# EAGLE board Fram_pcb (EAGLE 9.7.0)
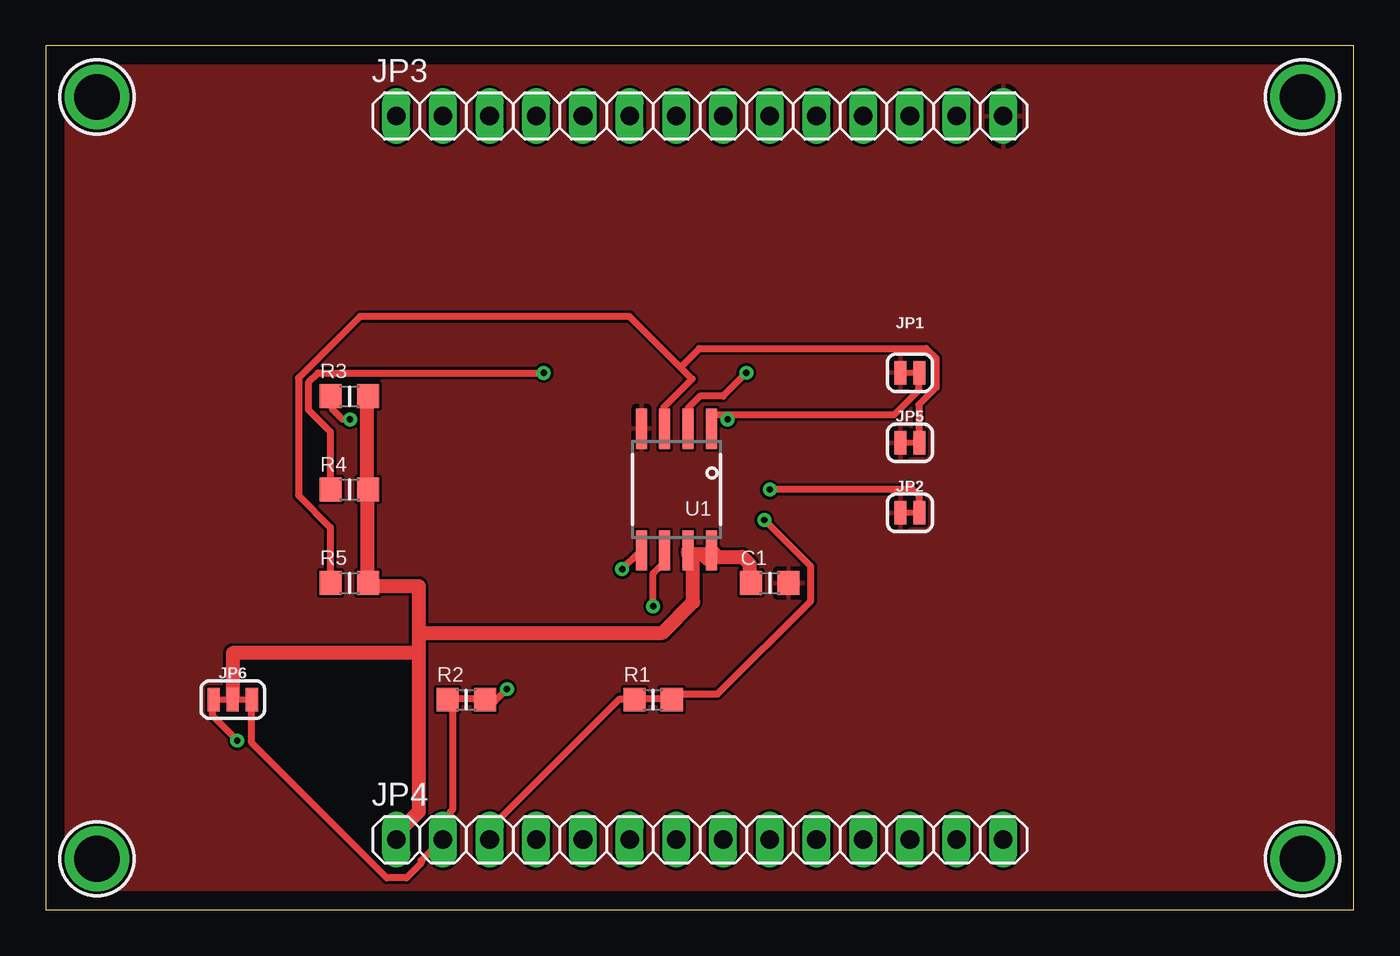
[diagram p0: board, top side]
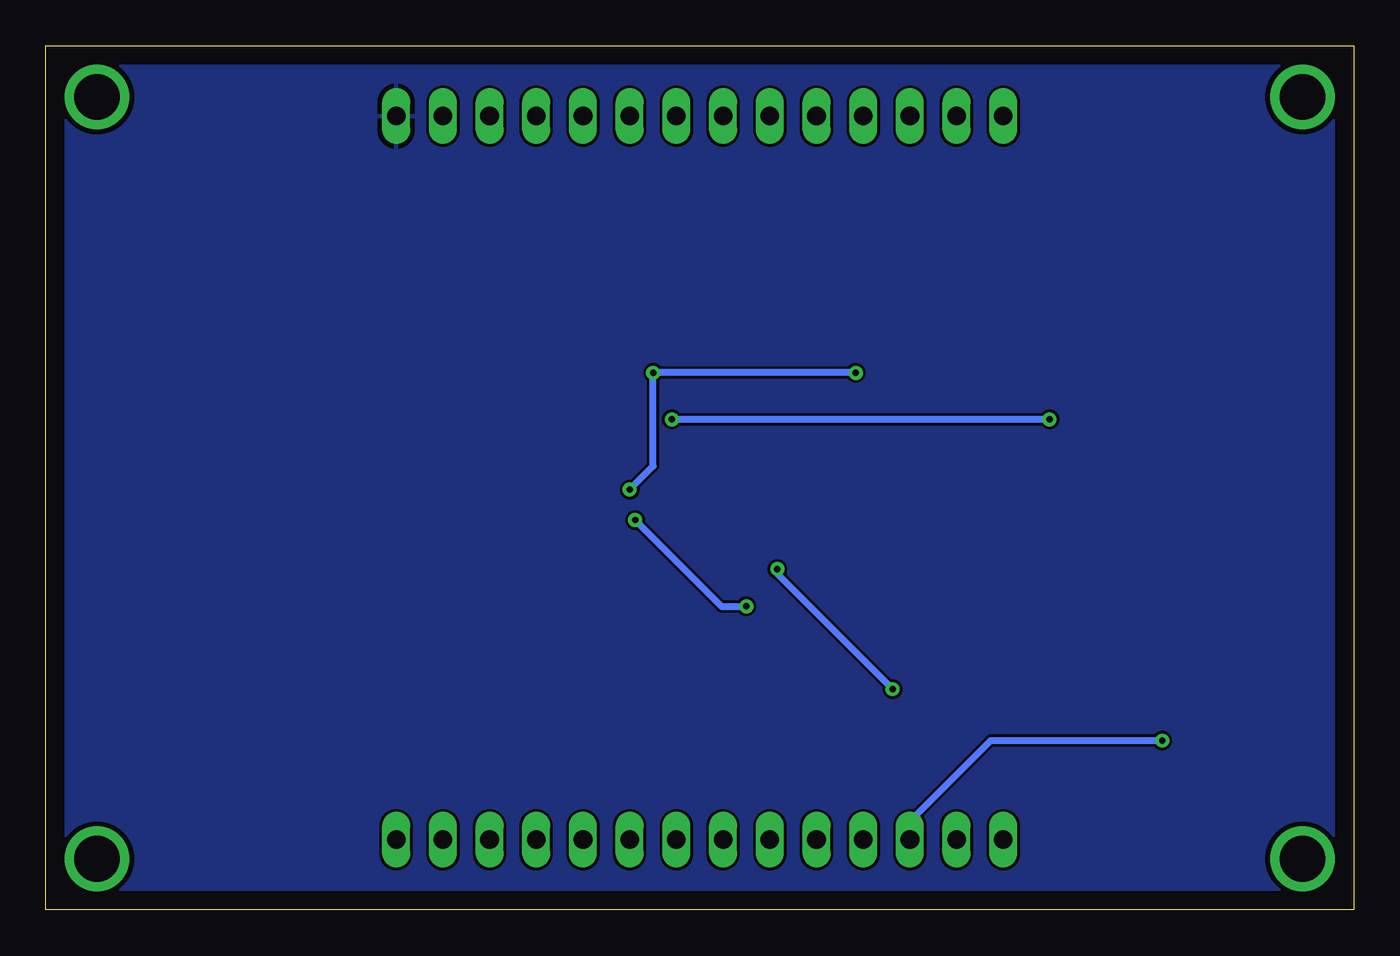
[diagram p1: board, bottom side, seen from below]

Size 71.12 x 46.99 mm. Coordinates in mm from the lower left corner, seen from the top.
Outline: 0,0 71.12,0 71.12,46.99 0,46.99 0,0
Copper layers (1*16): Top 0.035mm / dielectric 1.5mm / Bottom 0.035mm
Design rules "default": minimum track width 6mil, minimum drill 0.35mm, track to track 6mil, track to pad 6mil, pad to pad 6mil, via to via 6mil, smd to smd 6mil, copper to edge 40mil, drill to drill 6mil, minimum pad ring 10mil, minimum via ring 8mil, stop-mask expansion 4mil, vias tented up to drill 0mil, thermal gap 10mil
Net classes: 0 default: width 0.381 mm; 1 power: width 0.762 mm

## Footprints (pad centres in the part's own frame; a part is rotated, then mirrored left to right if it is on the bottom)
_0805MP = smd 1.2 x 1.3: 1 -1.016,0; 2 1.016,0
SMT-JUMPER_2_NC_TRACE_SILK = smd 0.66 x 1.27: 1 -0.521,0; 2 0.521,0
1X14 = drill 1.016 long: 1 -16.51,0; 2 -13.97,0; 3 -11.43,0; 4 -8.89,0; 5 -6.35,0; 6 -3.81,0; 7 -1.27,0; 8 1.27,0; 9 3.81,0; 10 6.35,0; 11 8.89,0; 12 11.43,0; 13 13.97,0; 14 16.51,0
SMT-JUMPER_3_2-NC_TRACE_SILK = smd 0.66 x 1.27: 1 -1.041,0; 2 0,0; 3 1.041,0
SOIC8_208MIL = smd 0.6 x 2.2: 1 -1.905,-3.315; 2 -0.635,-3.315; 3 0.635,-3.315; 4 1.905,-3.315; 5 1.905,3.315; 6 0.635,3.315; 7 -0.635,3.315; 8 -1.905,3.315
MOUNTINGHOLE_2.5_PLATED = drill 2.5 pad 3.2: P$1 0,0

## Placement (x,y rotation side)
C1  10uF  [_0805MP]  39.37,17.78 0 top
JP1  JUMPER-SMT_2_NC_TRACE_SILK  [SMT-JUMPER_2_NC_TRACE_SILK]  46.99,29.21 0 top
JP2  JUMPER-SMT_2_NC_TRACE_SILK  [SMT-JUMPER_2_NC_TRACE_SILK]  46.99,21.59 0 top
JP3  PINHD-1X14_1X14M  [1X14]  35.56,43.18 0 top
JP4  PINHD-1X14_1X14M  [1X14]  35.56,3.81 0 top
JP5  JUMPER-SMT_2_NC_TRACE_SILK  [SMT-JUMPER_2_NC_TRACE_SILK]  46.99,25.4 0 top
JP6  JUMPER-SMT_3_2-NC_TRACE_SILK  [SMT-JUMPER_3_2-NC_TRACE_SILK]  10.16,11.43 0 top
R1  10K  [_0805MP]  33.02,11.43 0 top
R2  10K  [_0805MP]  22.86,11.43 0 top
R3  10K  [_0805MP]  16.51,27.94 0 top
R4  10K  [_0805MP]  16.51,22.86 0 top
R5  10K  [_0805MP]  16.51,17.78 0 top
U1  MB85RC256VPF-G-JNERE2  [SOIC8_208MIL]  34.29,22.86 180 top
U$2  MOUNTINGHOLE2.5  [MOUNTINGHOLE_2.5_PLATED]  2.77,2.77 0 top
U$3  MOUNTINGHOLE2.5  [MOUNTINGHOLE_2.5_PLATED]  68.35,2.77 0 top
U$5  MOUNTINGHOLE2.5  [MOUNTINGHOLE_2.5_PLATED]  68.35,44.22 0 top
U$6  MOUNTINGHOLE2.5  [MOUNTINGHOLE_2.5_PLATED]  2.77,44.22 0 top

## Library data of the parts
C1 R1-R5 U1 = microbuilder
JP1 JP2 JP5 JP6 = SparkFun-Jumpers
JP3 JP4 = Tinkercad
U$2 U$3 U$5 U$6 = microbuilder; BOM: EXCLUDE

## Nets
3V3 [power]: C1.1 JP4.1 JP6.2 R3.2 R4.2 R5.2 U1.7 U1.8
GND [power]: C1.2 JP1.1 JP2.1 JP3.14 JP5.1 U1.4
SCL: JP4.3 JP6.1 R1.1 R1.2 U1.6
SDA: JP4.2 JP6.3 R2.1 R2.2 U1.5
SDA1: JP1.2 R3.1 U1.1
SDA2: JP2.2 R4.1 U1.2
SDA3: JP5.2 R5.1 U1.3

## Tracks (layer width: path | path; a pad name or v marks a point on that pad's centre or on a via)
3V3
  Top 0.152: 36.2,19.37 U1.8 | 34.92,19.37 U1.7
  Top 0.762: C1.1 38.27,17.87 38.27,18.8 37.87,19.2 36.54,19.2 36.27,19.47 U1.8 36.14,19.07 36.01,19.07 35.74,19.34 34.94,19.34 U1.7 35.2,19.07 35.2,16.73 33.53,15.06 20.27,15.06 | R3.2 17.47,27.87 17.47,23.2 R4.2 17.47,22.8 17.47,17.87 R5.2 17.87,17.6 20.27,17.6 20.27,15.06 | 20.27,15.06 20.27,13.97 | 20.27,13.97 20.27,5.33 19.07,4.13 19.07,3.87 JP4.1 | 20.27,13.97 10.16,13.97 JP6.2
GND
  pour Top: 0.08,0.08 71.04,0.08 71.04,46.91 0.08,46.91
  pour Bottom: 0.08,0.08 71.04,0.08 71.04,46.91 0.08,46.91
N$3
  pour Top: 31.83,20.4 36.75,20.4 36.75,25.32 31.83,25.32
SCL  (via drill 0.35)
  Top 0.152: 31.75,11.43 R1.1 | 33.66,19.37 U1.6
  Top 0.381: v10.4,9.2 9.07,10.54 9.07,11.34 JP6.1 | JP4.3 24.14,3.87 24.14,4.4 31.2,11.47 31.74,11.47 R1.1 32,11.47 34,11.47 R1.2 34.14,11.6 34.27,11.73 36.54,11.73 41.6,16.8 41.6,18.67 v39.07,21.2 | 33.74,19.6 U1.6 | v33.02,16.51 33.02,18.3 33.66,18.93 33.66,19.37
  Bottom 0.381: v10.4,9.2 19.74,9.2 24,4.93 24,3.87 JP4.3 | v39.07,21.2 34.38,16.51 v33.02,16.51
SDA  (via drill 0.35)
  Top 0.152: 21.91,11.43 R2.1 | 32.38,19.37 U1.5
  Top 0.381: JP6.3 11.2,9.07 18.54,1.73 19.6,1.73 20.4,2.53 20.4,2.67 21.47,3.73 JP4.2 21.6,4 21.6,4.8 22,5.2 22,5.33 22.14,5.47 22.14,11.34 R2.1 21.87,11.47 23.87,11.47 R2.2 24,11.34 24.4,11.34 v25.07,12 | v31.34,18.54 32.27,19.47 U1.5
  Bottom 0.381: v31.34,18.54 31.34,18.27 v25.07,12
SDA1  (via drill 0.35)
  Top 0.381: 37.07,26.94 36.41,26.94 36.27,26.8 36.27,26.27 U1.1 | 37.07,26.94 46.14,26.94 47.47,28.27 47.47,29.2 JP1.2 | v16.54,26.67 16.14,26.67 15.6,27.2 15.6,27.87 R3.1 | v37.07,26.67 37.07,26.94
  Bottom 0.381: v16.54,26.67 v37.07,26.67
SDA2  (via drill 0.35)
  Top 0.381: 46.94,23.07 47.07,22.94 | 47.07,22.94 47.47,22.54 47.47,21.6 JP2.2 | 34.94,26.14 U1.2 34.92,27.3 35.56,27.94 36.83,27.94 v38.1,29.21 | v27.07,29.2 14.8,29.2 14.27,28.67 14.27,27.2 15.47,26 15.47,22.94 R4.1 | 47.07,22.94 46.99,22.86 v39.37,22.86
  Bottom 0.381: v39.37,22.86 38.1,24.13 v38.1,29.21 v27.08,29.21 v27.07,29.2
SDA3
  Top 0.381: 34.51,29.51 35.53,30.54 47.87,30.54 48.41,30 48.41,28.4 47.47,27.47 47.47,25.47 JP5.2 | U1.3 33.6,26.27 33.6,27.34 35.14,28.87 34.51,29.51 | 34.51,29.51 31.74,32.28 17.07,32.28 13.73,28.94 13.73,22.54 15.47,20.8 15.47,17.87 R5.1